# Altium PCB esp32_controller.PcbDoc
Units mil, origin at the board's own origin, x right, y up, seen from the top; angles counter-clockwise.
Board outline 2165.35 x 2165.35 mil, 2 copper layers (Top Layer, Bottom Layer); 42 components, 30 nets, 198 pads, 6 vias.
Unrouted connection lines stored in the file: 122.
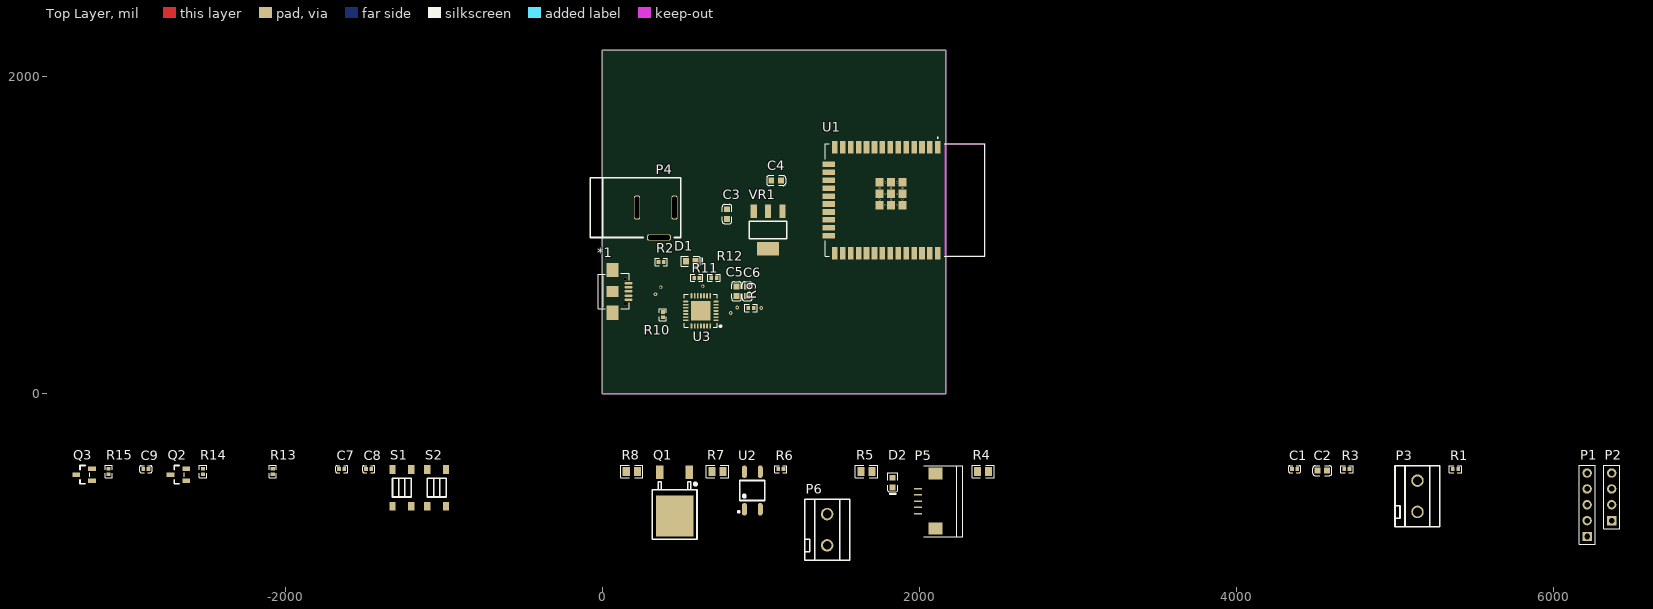
[diagram p0: Top Layer view]
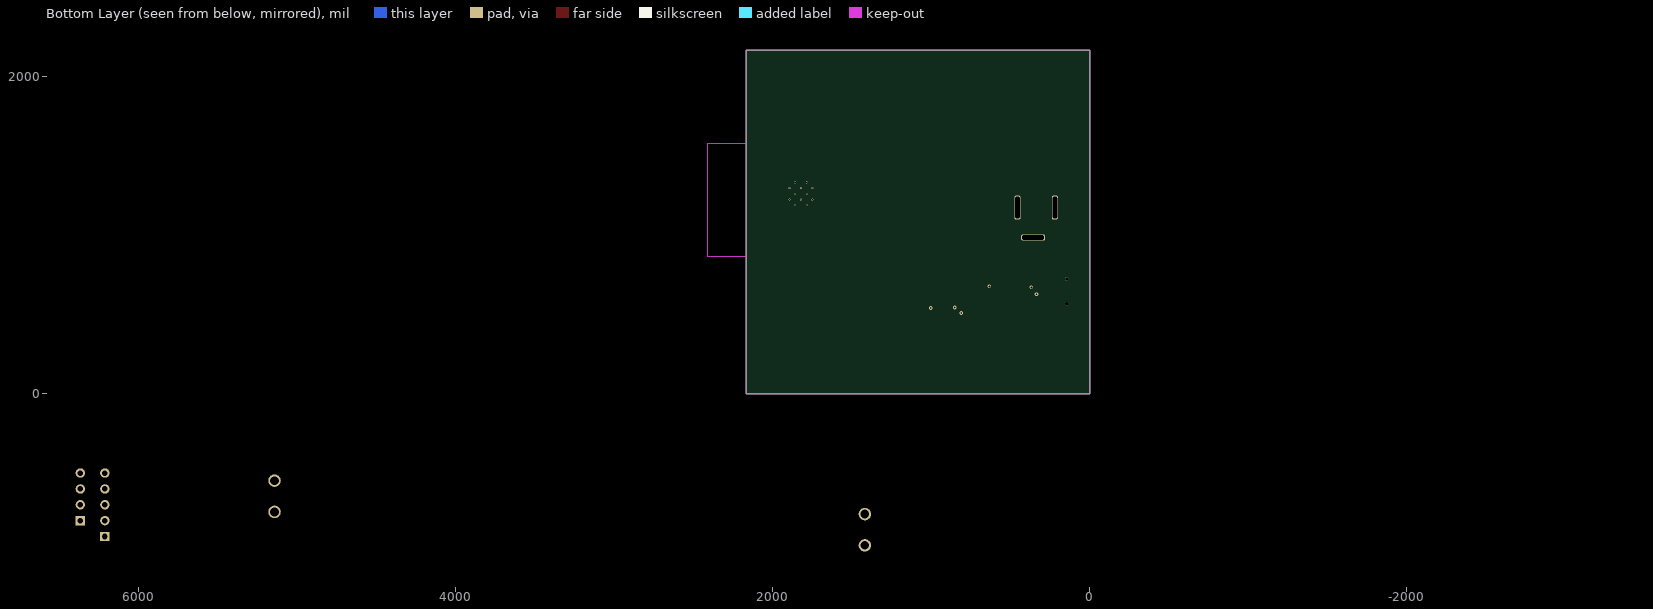
[diagram p1: Bottom Layer view, seen from below]

## Layer stack, top to bottom
Top Solder: solder mask 0.4, Solder Resist, Dk 3.5
Top Layer: signal copper 1.4
Dielectric 1: dielectric 12.6, FR-4, Dk 4.8
Bottom Layer: signal copper 1.4
Bottom Solder: solder mask 0.4, Solder Resist, Dk 3.5

## Board outline
0,0 2165.35,0 2165.35,2165.35 0,2165.35

## Design rules (kind name [scope] priority, off if disabled: settings)
Clearance [All] p1: gap=10 ignorepadtopadclearanceinfootprint=FALSE except(0: Arc-Hole Track-Hole SMDPad-Hole THPad-Hole Via-Hole Fill-Hole Poly-Hole Region-Hole Text-Hole)
PolygonConnect [All] p1: connectstyle=Relief reliefconductorwidth=10 reliefentries=4 polygonreliefangle="90 Angle" airgapwidth=10
RoutingVias [All] p1: holewidth=28 width=50 viastyle="Through Hole" minholewidth=28 minwidth=50 maxholewidth=28 maxwidth=50
SolderMaskExpansion [All] p1: expansion=4
Width [All] p1: maxlimit=10 minlimit=10 preferedwidth=10
30 further rules are at their usual default settings.

## Components (designator, comment, footprint, x,y, rotation, side; value= is the part's Value field where it differs from the comment)
*1 "MicroUSB Female" "MicroUSB Female" 64.96,644.88 r270 top
C1 "100nF" 0402_C 4366.36,-475.63 r0 top
C2 "10uF" 0603_C 4541.36,-485.63 r0 top
C3 "22uF (226) 20% 6.3V" 0603_C 786.22,1132.94 r90 top
C4 "22uF" 0603_C 1096.06,1343.7 r180 top
C5 "4.7uF" 0603_C 846.06,645.67 r270 top
C6 "100nF" 0603_C 914.17,645.67 r270 top
C7 "100nF" 0402_C -1643.64,-475.63 r0 top
C8 "100nF" 0402_C -1473.64,-475.63 r0 top
C9 "100nF (104) 10% 16V" 0402_C -2878.64,-475.63 r0 top
D1 "红灯 0603" 0603_LED_S1 558.27,835.43 r180 top
D2 "绿灯 0603" 0603_LED_S1 1831.36,-560.63 r90 top
P1 "Header 5" HDR1X5 6211.36,-900.63 r90 top
P2 "Header 4" HDR1X4 6366.36,-800.63 r90 top
P3 "FAN" CONNECT_2PIN 5141.36,-745.63 r90 top
P4 "DC-005 5.5-2.0MM" DC-005 455.51,1174.02 r270 top
P5 "5P 1.0mm" "FPC 1.00MM CONNECTOR SMT" 2101.36,-850.63 r90 top
P6 "CONNECT_2PIN" CONNECT_2PIN 1418.11,-956.3 r90 top
Q1 "NCE6050KA" TO-252-2 456.36,-495.63 r90 top
Q2 "SS8050" SOT-23(SOT-23-3) -2673.64,-510.63 r0 top
Q3 "SS8050" SOT-23(SOT-23-3) -3268.64,-510.63 r0 top
R1 "0Ω" 0402_R 5381.36,-475.63 r0 top
R2 "2KΩ (2001) ±1%" 0402_R 371.06,830.91 r180 top
R3 "0Ω" 0402_R 4696.36,-475.63 r0 top
R4 "4.7KΩ" 0805_R 2401.36,-490.63 r0 top
R5 "4.7KΩ" 0805_R 1666.36,-490.63 r0 top
R6 "1KΩ" 0402_R 1126.36,-475.63 r0 top
R7 "1KΩ" 0805_R 726.36,-490.63 r0 top
R8 "10KΩ" 0805_R 186.36,-490.63 r0 top
R9 "2KΩ" 0402_R 937.6,540.55 r180 top
R10 "10KΩ" 0402_R 381.89,498.23 r270 top
R11 "10KΩ" 0402_R 596.26,730.32 r180 top
R12 "49.9KΩ" 0402_R 704.53,731.1 r180 top
R13 "10KΩ (1002) ±1%" 0402_R -2078.64,-490.63 r90 top
R14 "10KΩ" 0402_R -2518.64,-490.63 r90 top
R15 "10KΩ" 0402_R -3113.64,-490.63 r90 top
S1 "Tactile Switch 轻触开关" button -1323.64,-710.63 r90 top
S2 "Tactile Switch 轻触开关" button -1103.64,-710.63 r90 top
U1 "Espress" MODULE_ESP32-WROOM-32D 2116.34,1555.81 r270 top
U2 "EL357N(B)(TA)-G" SOP-4_P2.54 946.36,-610.63 r90 top
U3 "CP2102-GMR" QFN-28_5x5x05P 621.65,522.05 r90 top
VR1 "AMS1117-3.3" SOT-223 1045.67,1031.89 r90 top

## Footprints (in the part's own frame and the unit in brackets; to place one, negate y for a bottom-side part, rotate by r counter-clockwise, add the part's x,y. Pads: shape width x height; smd on the part's side, far side on the other; paste and mask are expansions set on the pad)
0402_C [mm]
  rect 0.6x0.65 smd mask+0.051: 1(-0.425,0) 2(0.425,0)
  silkscreen extent -0.97,-0.58 0.97,0.58, body extent -0.48,-0.3 0.52,0.3, height 0.2
0402_R [mm]
  rect 0.6x0.65 smd mask+0.051: 1(-0.425,0) 2(0.425,0)
  silkscreen extent -0.97,-0.58 0.97,0.58, body extent -0.57,-0.27 0.58,0.28, height 0.41
0603_C [mm]
  rect 0.93x0.98 smd: 1(-0.77,0) 2(0.77,0)
  silkscreen extent -1.53,-0.79 1.54,0.79, body extent -0.8,-0.4 0.8,0.4, height 0.3
0603_LED_S1 [mm]
  rect 0.93x0.98 smd: A(0.77,0) K(-0.77,0)
  silkscreen extent -1.98,-0.79 1.54,0.79, body extent -0.8,-0.4 0.8,0.4, height 0.6
0805_R [mm]
  rect 1.16x1.47 smd: 1(-0.89,0) 2(0.89,0)
  silkscreen extent -1.77,-1.04 1.77,1.03, body extent -1,-0.62 1,0.63, height 0.49
button [mm]
  rect 1.4x1 smd: 1(0,0) 2(5.9,0) 3(0,-3) 4(5.9,-3)
  silkscreen extent 1.5,-3 4.5,0
CONNECT_2PIN [mm]
  round 2 hole 1.4 paste+0: 1(0,0) 2(5,0)
  silkscreen extent -2.4,-3.6 7.4,3.6
DC-005 [mm] "DC Power jack"
  rrect50% 1x3.8 hole 0.762 slot 3.5 at 90 deg unplated: 2(4.8,-2.5)
  rrect50% 3.8x1 hole 0.762 slot 3.5 at 0 deg unplated: 3(0,-6) 4(0,0)
  silkscreen extent -4.8,-13.5 4.8,1
"FPC 1.00MM CONNECTOR SMT" [mm]
  rect 0.25x1.3 smd: 1(2.4,2.8) 2(3.4,2.8) 3(4.4,2.8) 4(5.4,2.8) 5(6.4,2.8)
  rect 1.9x2.3 smd: 6(8.8,0) 7(0,0)
  silkscreen extent -1.3,-4.4 10.1,1.9
HDR1X4 [mm] "Connector; Header; 4 Position"
  rect 1.5x1.5 hole 0.9: 1(0,0)
  round 1.5 hole 0.9: 2(2.54,0) 3(5.08,0) 4(7.62,0)
  silkscreen extent -1.27,-1.27 8.89,1.27
HDR1X5 [mm] "Connector; Header; 5 Position"
  rect 1.5x1.5 hole 0.9: 1(0,0)
  round 1.5 hole 0.9: 2(2.54,0) 3(5.08,0) 4(7.62,0) 5(10.16,0)
  silkscreen extent -1.27,-1.27 11.43,1.27
"MicroUSB Female" [mm]
  rect 2.286x1.9 smd: 0(-3.429,0) 0(3.429,0)
  round 0.5 hole 0.5: 0(-2,2.032)
  rect 1.8x1.9 smd: 0(0,0)
  round 0.5 hole 0.56: 0(2,2.032)
  oct 0.4x1.35 smd: 1(-1.3,2.54) 2(-0.65,2.54) 3(0,2.54) 4(0.65,2.54) 5(1.3,2.54)
  silkscreen extent -2.92,-2.29 2.79,2.67, body extent -4.05,-2.71 4.02,2.85, height 2.77
MODULE_ESP32-WROOM-32D [mm]
  rect 2x0.9 smd: 1(0,0) 2(0,-1.27) 3(0,-2.54) 4(0,-3.81) 5(0,-5.08) 6(0,-6.35) 7(0,-7.62) 8(0,-8.89) 9(0,-10.16) 10(0,-11.43) 11(0,-12.7) 12(0,-13.97) 13(0,-15.24) 14(0,-16.51) 25(17,-16.51) 26(17,-15.24) 27(17,-13.97) 28(17,-12.7) 29(17,-11.43) 30(17,-10.16) 31(17,-8.89) 32(17,-7.62) 33(17,-6.35) 34(17,-5.08) 35(17,-3.81) 36(17,-2.54) 37(17,-1.27) 38(17,0)
  rect 0.9x2 smd: 15(2.785,-17.51) 16(4.055,-17.51) 17(5.325,-17.51) 18(6.595,-17.51) 19(7.865,-17.51) 20(9.135,-17.51) 21(10.405,-17.51) 22(11.675,-17.51) 23(12.945,-17.51) 24(14.215,-17.51)
  rect 1.33x1.33 smd: 39_1(5.665,-5.665) 39_2(7.5,-5.665) 39_3(9.335,-5.665) 39_4(5.665,-7.5) 39_5(7.5,-7.5) 39_6(9.335,-7.5) 39_7(5.665,-9.335) 39_8(7.5,-9.335) 39_9(9.335,-9.335)
  round 0.3 hole 0.2: 39_10(6.583,-5.665) 39_11(8.418,-5.665) 39_12(5.665,-6.582) 39_13(7.5,-6.582) 39_14(9.335,-6.582) 39_15(6.583,-7.5) 39_16(8.418,-7.5) 39_17(5.665,-8.417) 39_18(7.5,-8.417) 39_19(9.335,-8.417) 39_20(6.583,-9.335) 39_21(8.418,-9.335)
  Keep-Out Layer region: 17.5,1.19 -0.5,1.19 -0.5,7.49 17.5,7.49
  Keep-Out Layer region: 17.5,1.19 -0.5,1.19 -0.5,7.49 17.5,7.49
  silkscreen extent -1.6,-18.01 17.5,7.49
QFN-28_5x5x05P [mm]
  rect 3.13x3.13 smd mask+0.051: 0(0,0)
  oval 0.28x0.85 smd mask+0.051: 1(-1.5,-2.425) 2(-1,-2.425) 3(-0.5,-2.425) 4(0,-2.425) 5(0.5,-2.425) 6(1,-2.425) 7(1.5,-2.425) 15(1.5,2.425) 16(1,2.425) 17(0.5,2.425) 18(0,2.425) 19(-0.5,2.425) 20(-1,2.425) 21(-1.5,2.425)
  oval 0.85x0.28 smd mask+0.051: 8(2.425,-1.5) 9(2.425,-1) 10(2.425,-0.5) 11(2.425,0) 12(2.425,0.5) 13(2.425,1) 14(2.425,1.5) 22(-2.425,1.5) 23(-2.425,1) 24(-2.425,0.5) 25(-2.425,0) 26(-2.425,-0.5) 27(-2.425,-1) 28(-2.425,-1.5)
  silkscreen extent -2.65,-3.3 2.65,2.65
SOP-4_P2.54 [mm]
  oval 2x0.8 smd: 1(-3,1.27) 2(-3,-1.27) 3(3,-1.27) 4(3,1.27)
  silkscreen extent -3.55,-2 1.6,2.35
SOT-23(SOT-23-3) [mm]
  rect 1.25x0.7 smd: 1(1.25,-0.95) 2(1.25,0.95) 3(-1.25,0)
  silkscreen extent -0.65,-1.46 0.9,1.46, body extent -1.5,-1.5 1.5,1.5, height 1.3
SOT-223 [mm]
  rect 2.2x1 smd: 1(3,-2.3) 2(3,0) 3(3,2.3)
  rect 2.2x3.5 smd: 2(-3,0)
  silkscreen extent -1.4,-3 1.4,3, body extent -3.49,-3.24 3.49,3.24, height 1.64
TO-252-2 [mm]
  rect 2.2x1.2 smd: 1(0,-2.361) 3(-0.004,2.361)
  rect 6.5x6 smd: 2(-7,0)
  silkscreen extent -10.75,-3.57 -1.5,3.57, body extent -9.74,-3.27 0.2,3.27, height 2.44

## Part data
C1 C7 C8 C9: library part "0402 100nF (104) 10% 16V", "贴片电容", Package=0402, SuppliersPartNumber=C1525, ComponentLink1Description=供应商链接, ComponentLink1URL=http://www.szlcsc.com/product/details_1877.html, Supplier=LC
C2: library part "0603 10uF (106) 10% 10V", "贴片电容", Package=0603, SuppliersPartNumber=C19702, ComponentLink1Description=供应商链接, ComponentLink1URL=http://www.szlcsc.com/product/details_20411.html, Supplier=LC
C3 C4: library part "0603 22uF (226) 20% 6.3V", "贴片电容", Package=0603, SuppliersPartNumber=C59461, ComponentLink1Description=供应商链接, ComponentLink1URL=http://www.szlcsc.com/product/details_60514.html, Supplier=LC
C5: library part "0603 4.7uF (475) 10% 16V", "贴片电容", Package=0603, SuppliersPartNumber=C19666, ComponentLink1Description=供应商链接, ComponentLink1URL=http://www.szlcsc.com/product/details_20375.html, Supplier=LC
C6: library part "0603 100nF (104) 10% 50V", "贴片电容", Package=0603, SuppliersPartNumber=C14663, ComponentLink1Description=供应商链接, ComponentLink1URL=http://www.szlcsc.com/product/details_15331.html, Supplier=LC
D1: library part "0603 红灯", "发光二极管", Package=0603, SuppliersPartNumber=C2286, ComponentLink1Description=供应商链接, ComponentLink1URL=http://www.szlcsc.com/product/details_2659.html, Supplier=LC
D2: library part "0603 绿灯", "发光二极管", Package=0603, SuppliersPartNumber=C72043, ComponentLink1Description=供应商链接, ComponentLink1URL=http://www.szlcsc.com/product/details_73152.html, Supplier=LC
P1: "Header, 5-Pin", LatestRevisionDate=17-Jul-2002, LatestRevisionNote="Re-released for DXP Platform.", Publisher="Altium Limited"
P2: "Header, 4-Pin", LatestRevisionDate=17-Jul-2002, LatestRevisionNote="Re-released for DXP Platform.", Publisher="Altium Limited"
P3: library part CONNECT_2PIN, "欧式接线端子 间距5MM", ComponentLink1Description=链接, ComponentLink1URL=https://item.szlcsc.com/8969.html
P4: "DC-005 5.5-2.0MM 铁材质", ComponentLink1Description=立创, ComponentLink1URL=https://item.szlcsc.com/16896.html
P5: library part "FPC Connect", "AFA01-S05FCA-00", ComponentLink1Description=立创, ComponentLink1URL=https://item.szlcsc.com/254012.html
P6: "欧式接线端子 间距5MM", ComponentLink1Description=链接, ComponentLink1URL=https://item.szlcsc.com/8969.html
Q1: "MOS(场效应管) N-Channel", ComponentLink1Description=链接, ComponentLink1URL=https://item.szlcsc.com/97217.html
Q2 Q3: library part "SOT-23 SS8050 Y1", "三极管", Package=SOT-23, SuppliersPartNumber=C2150, ComponentLink1Description=供应商链接, ComponentLink1URL=http://www.szlcsc.com/product/details_2507.html, Supplier=LC
R1 R3: library part "0402 0Ω (0R0) 1%", "贴片电阻", Package=0402, SuppliersPartNumber=C17168, ComponentLink1Description=供应商链接, ComponentLink1URL=http://www.szlcsc.com/product/details_17853.html, Supplier=LC
R2 R9: library part "0402 2KΩ (2001) 1%", "贴片电阻", Package=0402, SuppliersPartNumber=C4109, ComponentLink1Description=供应商链接, ComponentLink1URL=http://www.szlcsc.com/product/details_4516.html, Supplier=LC
R4 R5: library part "0805 4.7KΩ (4701) 1%", "贴片电阻", Package=0805, SuppliersPartNumber=C17673, ComponentLink1Description=供应商链接, ComponentLink1URL=http://www.szlcsc.com/product/details_18361.html, Supplier=LC
R6: library part "0402 1KΩ (1001) 1%", "贴片电阻", Package=0402, SuppliersPartNumber=C11702, ComponentLink1Description=供应商链接, ComponentLink1URL=http://www.szlcsc.com/product/details_12256.html, Supplier=LC
R7: library part "0805 1KΩ (1001) 1%", "贴片电阻", Package=0805, SuppliersPartNumber=C17513, ComponentLink1Description=供应商链接, ComponentLink1URL=http://www.szlcsc.com/product/details_18201.html, Supplier=LC
R8: library part "0805 10KΩ (1002) 1%", "贴片电阻", Package=0805, SuppliersPartNumber=C17414, ComponentLink1Description=供应商链接, ComponentLink1URL=http://www.szlcsc.com/product/details_18102.html, Supplier=LC
R10 R11 R13 R14 R15: library part "0402 10KΩ (1002) 1%", "贴片电阻", Package=0402, SuppliersPartNumber=C25744, ComponentLink1Description=供应商链接, ComponentLink1URL=http://www.szlcsc.com/product/details_26487.html, Supplier=LC
R12: library part "0402 49.9KΩ (4992) 1%", "贴片电阻", Package=0402, SuppliersPartNumber=C25897, ComponentLink1Description=供应商链接, ComponentLink1URL=http://www.szlcsc.com/product/details_26640.html, Supplier=LC
S1 S2: library part Button
U1: library part ESP32-WROOM-32D
U2: library part EL357N(B)(TA)-G_[C6649], "贴片光耦", Package=SOP-4_P2.54, SuppliersPartNumber=C6649, ComponentLink1Description=供应商链接, ComponentLink1URL=http://www.szlcsc.com/product/details_7114.html, Supplier=LC
U3: library part CP2102-GMR_[C6568], "USB", Package=QFN-28_5x5x05P, SuppliersPartNumber=C6568, ComponentLink1Description=供应商链接, ComponentLink1URL=http://www.szlcsc.com/product/details_7033.html, Supplier=LC
VR1: library part "SOT-223 AMS1117-3.3", "低压差线性稳压(LDO)", Package=SOT-223, SuppliersPartNumber=C6186, ComponentLink1Description=供应商链接, ComponentLink1URL=http://www.szlcsc.com/product/details_6652.html, Supplier=LC

## Via types
v1: diameter 24, hole 12, Top Layer to Bottom Layer, 6 vias

## Nets (pads, with @x,y where several pads share a name; then routed paths per layer and width w, separated by ;. In a path a pad name is that pad's centre, name@x,y a point inside that pad or via, vN(x,y) a via of type N, cw(c..) or ccw(c..) an arc to the next point about the centre after c; other vN are vias at no path point)
D+: *1.3 U3.4
  other v1: 810.24,508.27 335.04,627.17
D-: *1.2 U3.5
  other v1: 851.18,543.7 368.11,670.87
DTR: Q3.2 R14.1 U3.28
EL_CTR: U1.6 U2.2
EN: C8.2 C9.2 Q2.3 R13.1 S2.3 U1.3
EXT_5V: *1.1 C3.2 P3.2 P4.4 P6.1 R2.2 R4.2 R5.2 R11.2 VR1.3
GND: *1.5 C1.2 C2.2 C3.1 C4.1 C5.1 C6.1 C7.1 C8.1 C9.1 D1.K P1.5 P2.4 P3.1 P4.2 P4.3 P5.5 P5.6 P5.7 Q1.3 R8.1 R10.2 R12.1 S1.1 S2.1 U1.1 U1.15 U1.38 U1.39_1 U1.39_2 U1.39_3 U1.39_4 U1.39_5 U1.39_6 U1.39_7 U1.39_8 U1.39_9 U1.39_10 U1.39_11 U1.39_12 U1.39_13 U1.39_14 U1.39_15 U1.39_16 U1.39_17 U1.39_18 U1.39_19 U1.39_20 U1.39_21 U3.3 VR1.1
IIC_CLK: P1.2 P5.2 U1.14
IIC_DATA: P1.3 P5.3 U1.16
INT0: P5.4 U1.13
IO0: C7.2 Q3.3 S1.3 U1.25
NetD1_A: D1.A R2.1
NetD2_A: D2.A R4.1
NetD2_K: D2.K P6.2 Q1.2
NetQ1_1: Q1.1 R7.2 R8.2
NetQ2_1: Q2.1 R14.2
NetQ3_1: Q3.1 R15.2
NetR5_1: R5.1 U2.4
NetR6_1: R6.1 U2.1
NetR7_1: R7.1 U2.3
NetR9_1: R9.1 U3.9
  other v1: 1002.36,540.16 633.07,677.17
NetR10_1: R10.1 U3.12
NetR11_1: R11.1 R12.2 U3.8
RTS: Q2.2 R15.1 U3.24
RXD: R3.1 U3.25
RXD0: P2.3 R1.2 U1.34
TP0: P1.4 U1.7
TXD: R1.1 U3.26
TXD0: P2.2 R3.2 U1.35
VCC: C1.1 C2.1 C4.2 C5.2 C6.2 P1.1 P2.1 P5.1 R6.2 R9.2 R13.2 U1.2 U3.6 U3.7 VR1.2
pads on no net: *1.0 *1.4 S1.2 S1.4 S2.2 S2.4 U1.4 U1.5 U1.8 U1.9 U1.10 U1.11 U1.12 U1.17 U1.18 U1.19 U1.20 U1.21 U1.22 U1.23 U1.24 U1.26 U1.27 U1.28 U1.29 U1.30 U1.31 U1.32 U1.33 U1.36 U1.37 U3.0 U3.1 U3.2 U3.10 U3.11 U3.13 U3.14 U3.15 U3.16 U3.17 U3.18 U3.19 U3.20 U3.21 U3.22 U3.23 U3.27

## Keep-outs
Keep-Out Layer:
  the board outline again, w10

## Text inside footprints (layer, text, board x,y; h text height)
U1: Mechanical 13 "ANTENNA" at 2263.58,1457.38 h70 r270